# EAGLE board Relay-Board_Rack-PDU (EAGLE 9.2.1)
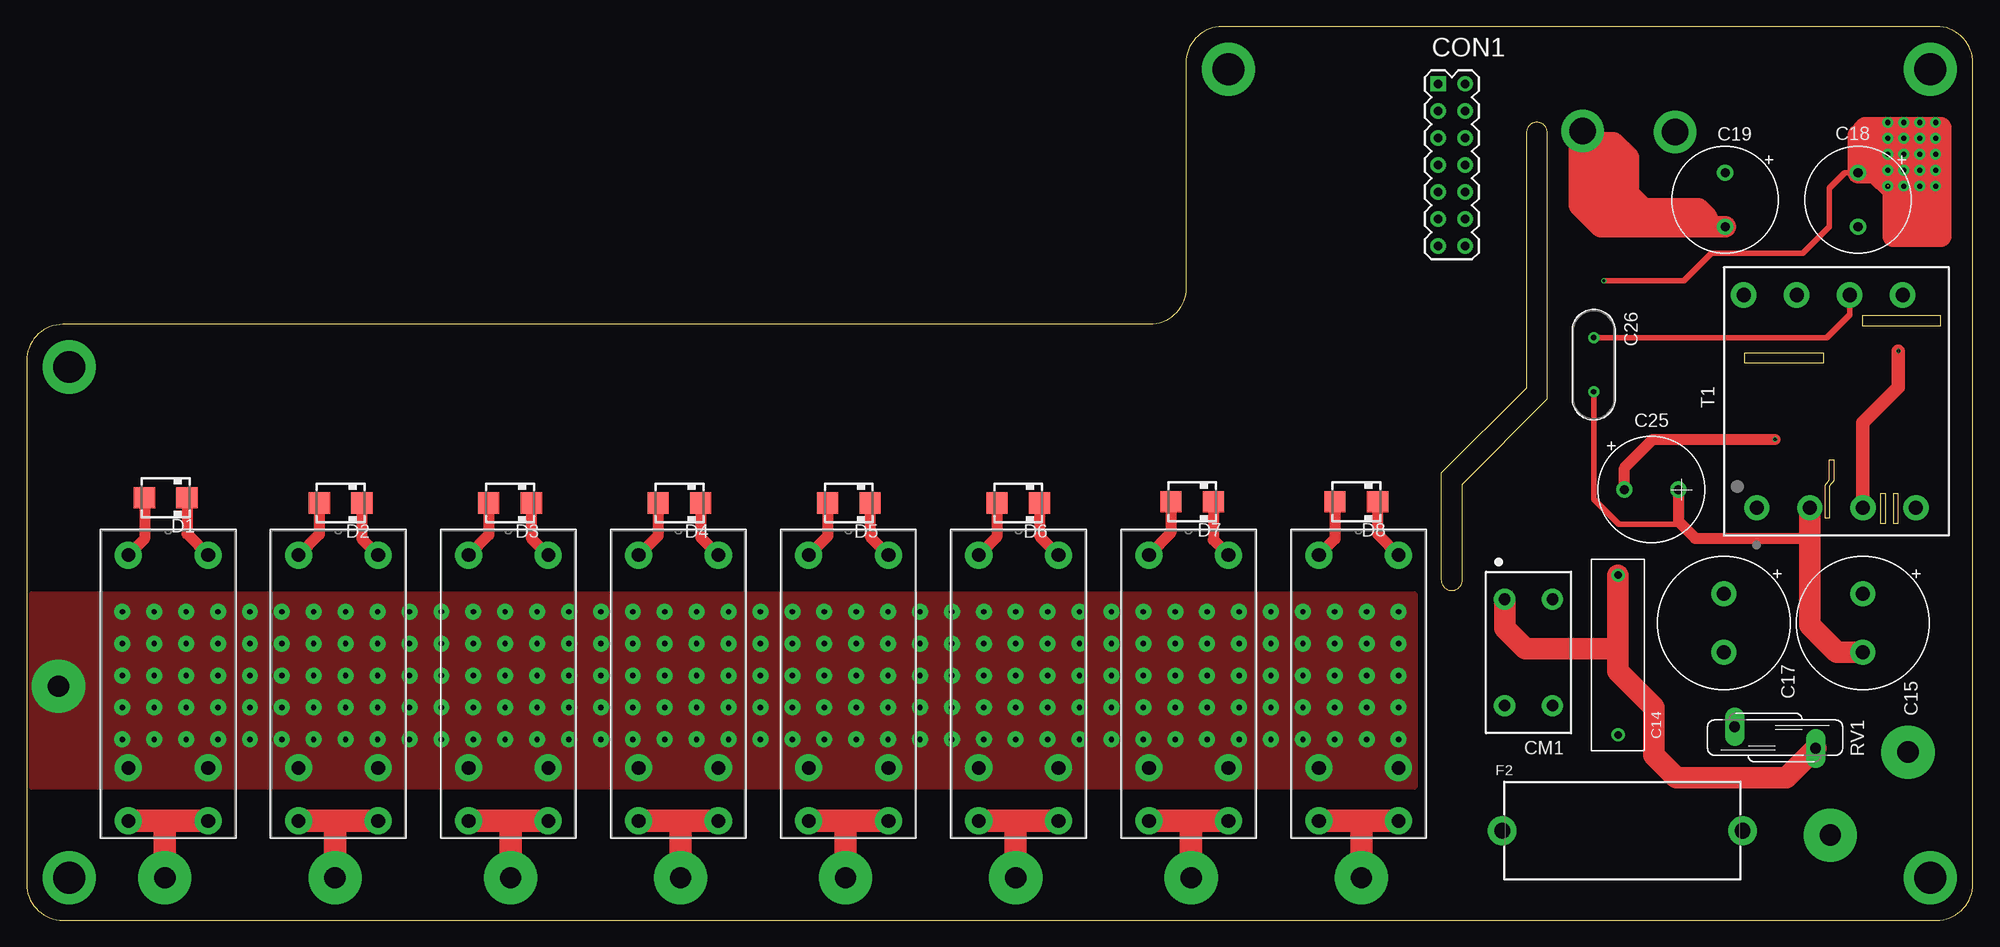
[diagram p0: board, top side]
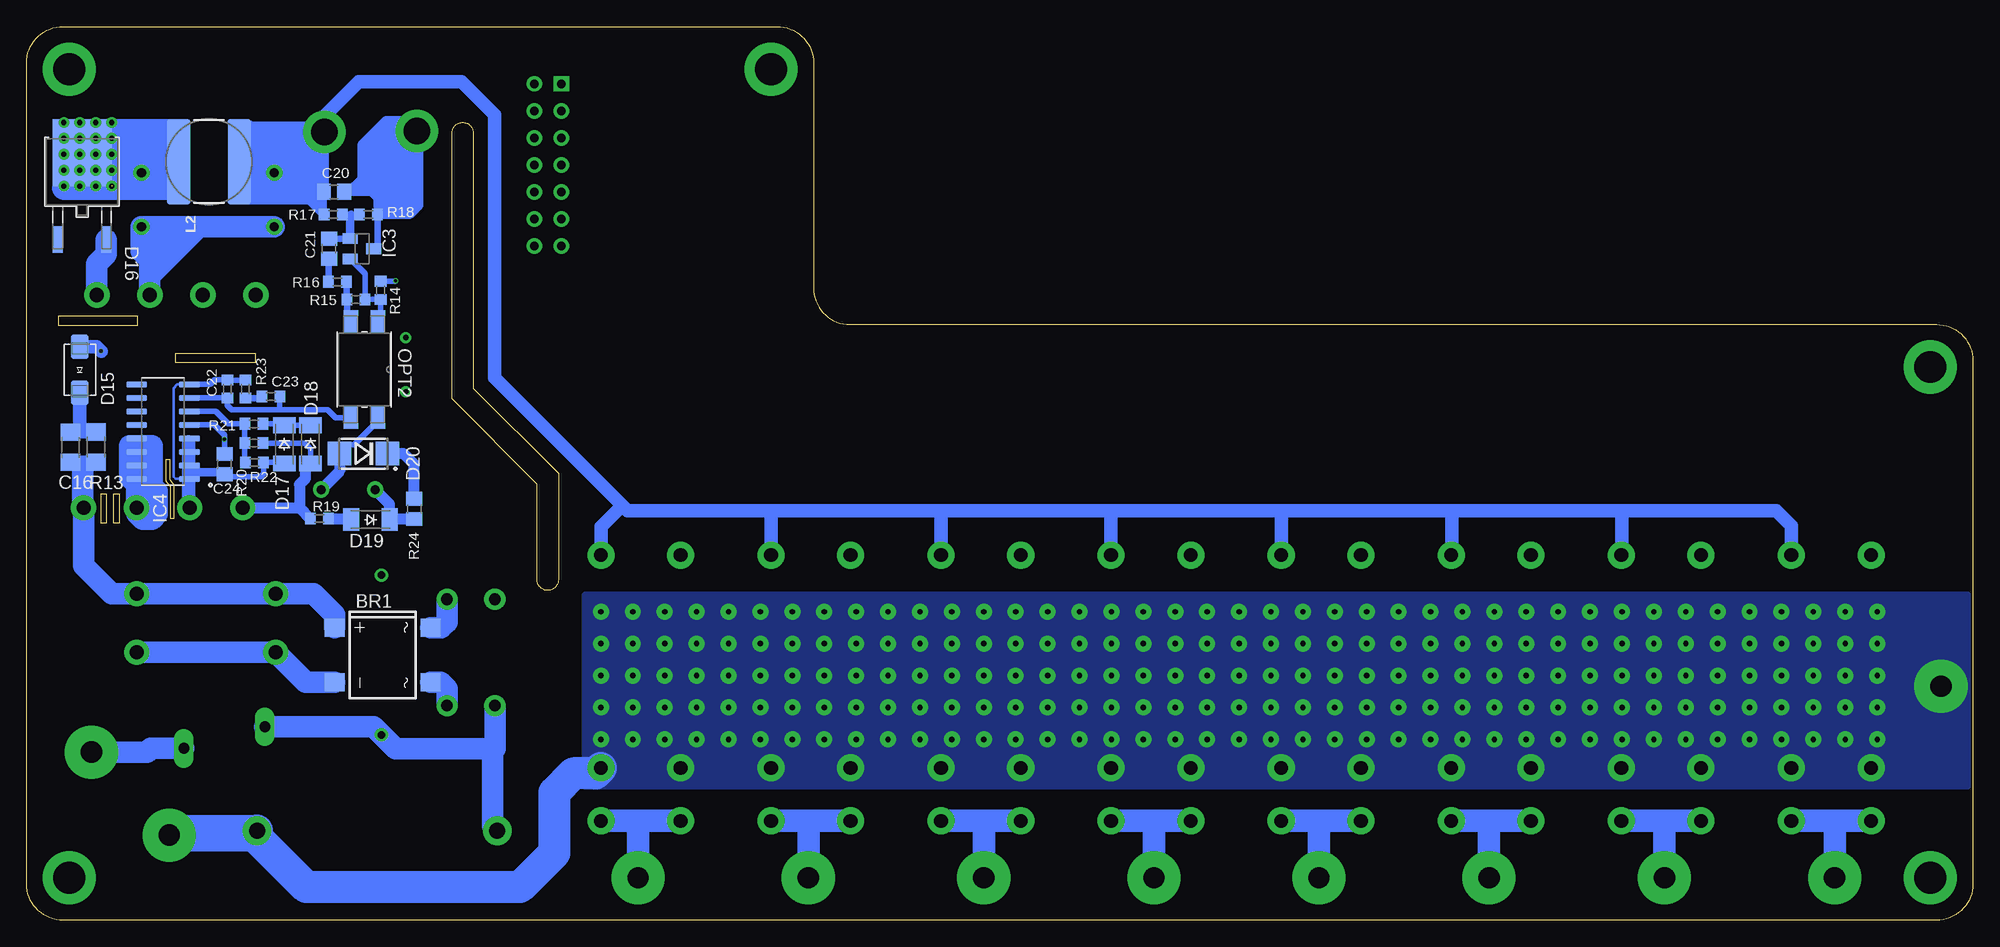
[diagram p1: board, bottom side, seen from below]

Size 183 x 84 mm. Coordinates in mm from the lower left corner, seen from the top.
Outline: 105.59,56 3.41,56 arc90 0,52.59 0,3.41 arc90 3.41,0 179.59,0 arc90 183,3.41 183,80.59 arc90 179.59,84 112.41,84 arc90 109,80.59 109,59.41 arc-90 105.59,56
Outline: 161.5,53.3 161.5,52.4 169,52.4 169,53.3 161.5,53.3
Outline: 172.6,55.9 180,55.9 180,56.8 172.6,56.8 172.6,55.9
Outline: 169.1,37.8 169.1,40.9 169.5,41.4 169.5,43.3 169.9,43.3 169.9,41.3 169.5,40.8 169.5,37.8 169.1,37.8
Outline: 175.5,40.1 175.5,37.3 176,37.3 176,40.1 175.5,40.1
Outline: 174.3,40.1 174.3,37.3 174.8,37.3 174.8,40.1 174.3,40.1
Outline: 143,49 143,74 arc90 142,75 arc90 141,74 141,50 133,42 133,32 arc90 134,31 arc90 135,32 135,41 143,49
Copper layers (1*16): Top 0.035mm / dielectric 1.6mm / Bottom 0.035mm
Design rules "jlcpcb-2layers *": minimum track width 5mil, minimum drill 0.2mm, track to track 5mil, track to pad 5mil, pad to pad 5mil, via to via 5mil, smd to smd 5mil, copper to edge 0.2mm, drill to drill 6mil, minimum pad ring 10mil, minimum via ring 3mil, stop-mask expansion 4mil, vias tented up to drill 0mil, thermal gap 10mil

## Footprints (pad centres in the part's own frame; a part is rotated, then mirrored left to right if it is on the bottom)
DBS = smd 1.7 x 1.9: + -2.55,-4.5; - 2.55,-4.5; AC1 -2.55,4.5; AC2 2.55,4.5
103-275V = drill 0.7: 1 -7.5,0; 2 7.5,0
CAPPRD550W110D1250H2500B = drill 1.3 pad 1.95: 1 -2.75,0; 2 2.75,0
C1206 = smd 1.6 x 1.803: 1 -1.422,0; 2 1.422,0
CAPPRD508W65D1000H1100B = drill 0.85 pad 1.45: 1 -2.54,0; 2 2.54,0
C0805 = smd 1.3 x 1.5: 1 -0.95,0; 2 0.95,0
C0603 = smd 1 x 1.1: 1 -0.85,0; 2 0.85,0
AR21AC103K4R = drill 0.508 pad 1.016: 1 -2.54,0; 2 2.54,0
WE-CMB_XS_744821120 = drill 1.1: 1 -5,-2.25; 2 5,-2.25; 3 5,2.25; 4 -5,2.25
2X7 = drill 0.8 square: 1 -1.27,7.62 | drill 0.8: 2 1.27,7.62; 3 -1.27,5.08; 4 1.27,5.08; 5 -1.27,2.54; 6 1.27,2.54; 7 -1.27,0; 8 1.27,0; 9 -1.27,-2.54; 10 1.27,-2.54; 11 -1.27,-5.08; 12 1.27,-5.08; 13 -1.27,-7.62; 14 1.27,-7.62
SMA = smd 2 x 2: A 2,0; C -2,0
SMA' = smd 2.28 x 1.66: A 2.165,0; C -2.165,0
DPAK_STM = smd 0.94 x 2.489: 1 -2.286,-6.388; 2 2.286,-6.388 | smd 5.563 x 6.299: 3 0,1.765
SOD-123_MINI-SMA = smd 1.5 x 2.1: A 1.8,0; C -1.8,0
DO214AC = smd 2.2 x 2.21: A 2.25,0; C -2.25,0
696101000002 = drill 1.5: 1 -11.3,0; 2 11.3,0
SOT23 = smd 1 x 1.4: 1 -0.95,-1.1; 2 0.95,-1.1; 3 0,1.1
VIPER35HD = smd 1.97 x 0.57: 1 -2.475,4.445; 2 -2.475,3.175; 3 -2.475,1.905; 4 -2.475,0.635; 5 -2.475,-0.635; 6 -2.475,-1.905; 7 -2.475,-3.175; 8 -2.475,-4.445; 9 2.475,-4.445; 10 2.475,-3.175; 11 2.475,-1.905; 12 2.475,-0.635; 13 2.475,0.635; 14 2.475,1.905; 15 2.475,3.175; 16 2.475,4.445
INDUCTOR-BOURNS_SRN8040 = smd 8 x 2.2: 1 0,2.85; 2 0,-2.85
SMD-4_SFH610X_VIS-M = smd 2.083 x 1.372: 1 -4.534,1.27; 2 -4.534,-1.27; 3 4.534,-1.27; 4 4.534,1.27
1206 = smd 1.6 x 1.803: 1 -1.422,0; 2 1.422,0
0603 = smd 1 x 1.1: 1 -0.85,0; 2 0.85,0
0805 = smd 1.3 x 1.5: 1 -0.95,0; 2 0.95,0
RELAY_G2RL-1A-E_DC5_OMR = drill 1.295 pad 2.54: 1 -3.683,12.776; 3 -3.683,-7.239; 4 -3.683,-12.217; 5 3.81,-12.217; 6 3.81,-7.239; 8 3.81,12.776
S10K40 = drill 1.016 long: 1 -1.016,-3.81; 2 1.016,3.81
WE-OLSTM_EE20_L22.2W25H16 = drill 1.32 pad 1.93: 1 -10,7.48; 3 -10,2.5; 4 -10,-2.5; 6 -10,-7.48; 8 10,-6.225; 10 10,-1.245; 12 10,3.735; 14 10,8.715

## Placement (x,y rotation side)
BR1  DBLS207G  [DBS]  149.52,24.93 270 bottom
C14  100nF 275V  [103-275V]  149.62,24.93 90 top
C15  15uF 400V  [CAPPRD550W110D1250H2500B]  172.65,27.94 270 top
C16  10nF 1kV  [C1206]  178.87,44.46 90 bottom
C17  15uF 400V  [CAPPRD550W110D1250H2500B]  159.58,27.94 270 top
C18  470uF 25V  [CAPPRD508W65D1000H1100B]  172.2,67.72 270 top
C19  100uF 25V  [CAPPRD508W65D1000H1100B]  159.7,67.72 270 top
C20  1uF 25V  [C0805]  154.1,68.47 0 bottom
C21  10nF 50V  [C0805]  154.57,63.12 90 bottom
C22  2.2nF 50V  [C0603]  164.12,49.93 90 bottom
C23  33nF 16V  [C0603]  160.03,49.23 180 bottom
C24  220pF  [C0805]  164.39,42.87 270 bottom
C25  100uF 25V  [CAPPRD508W65D1000H1100B]  152.77,40.48 0 top
C26  DE2E3KY222MA2BM01  [AR21AC103K4R]  147.35,52.22 90 top
CM1  20mH CM CHOKE  [WE-CMB_XS_744821120]  141.22,25.17 270 top
CON1  [2X7]  134,71 0 top
D1  MBRA340T3  [SMA]  13.09,39.72 180 top
D2  MBRA340T3  [SMA]  29.52,39.22 180 top
D3  MBRA340T3  [SMA]  45.45,39.22 180 top
D4  MBRA340T3  [SMA]  61.38,39.22 180 top
D5  MBRA340T3  [SMA]  77.31,39.22 180 top
D6  MBRA340T3  [SMA]  93.24,39.22 180 top
D7  MBRA340T3  [SMA]  109.59,39.33 180 top
D8  MBRA340T3  [SMA]  125.02,39.33 180 top
D15  MRA4007T3G  [SMA']  178,51.74 90 bottom
D16  STPS5H100B  [DPAK_STM]  177.78,70.36 0 bottom
D17  BAT41ZFILM  [SOD-123_MINI-SMA]  158.76,44.73 270 bottom
D18  BAT41ZFILM  [SOD-123_MINI-SMA]  156.31,44.73 270 bottom
D19  BAT41ZFILM  [SOD-123_MINI-SMA]  150.67,37.66 180 bottom
D20  MMSZ5248B-V-GS08  [DO214AC]  151.33,43.85 180 bottom
F2  696101000002  [696101000002]  150.04,8.42 180 top
IC3  TS432ILT  [SOT23]  151.46,63.12 270 bottom
IC4  [VIPER35HD]  170.17,45.93 180 bottom
L2  3.3uH SD43-332ML  [INDUCTOR-BOURNS_SRN8040]  165.85,71.3 90 bottom
OPT2  SFH6106-2T  [SMD-4_SFH610X_VIS-M]  151.25,51.77 270 bottom
R13  220K 5% 0.33W 200V  [1206]  176.48,44.47 270 bottom
R14  1K  [0603]  149.71,59.21 270 bottom
R15  12K  [0603]  152.03,58.34 180 bottom
R16  82K  [0603]  153.77,60.01 180 bottom
R17  130K 1%  [0603]  154.17,66.33 0 bottom
R18  15K 1%  [0603]  150.86,66.33 0 bottom
R19  4.7R 1%  [0603]  155.47,37.76 0 bottom
R20  330K 1%  [0603]  161.63,44.85 180 bottom
R21  133K 1%  [0603]  161.63,46.66 180 bottom
R22  30K 1%  [0603]  161.57,43.03 0 bottom
R23  47K 1%  [0603]  162.42,49.93 90 bottom
R24  220R  [0805]  146.56,38.66 90 bottom
REL1  G2RL-1A-E_DC12  [RELAY_G2RL-1A-E_DC5_OMR]  13.26,21.55 0 top
REL2  G2RL-1A-E_DC12  [RELAY_G2RL-1A-E_DC5_OMR]  29.25,21.55 0 top
REL3  G2RL-1A-E_DC12  [RELAY_G2RL-1A-E_DC5_OMR]  45.24,21.55 0 top
REL4  G2RL-1A-E_DC12  [RELAY_G2RL-1A-E_DC5_OMR]  61.23,21.55 0 top
REL5  G2RL-1A-E_DC12  [RELAY_G2RL-1A-E_DC5_OMR]  77.22,21.55 0 top
REL6  G2RL-1A-E_DC12  [RELAY_G2RL-1A-E_DC5_OMR]  93.21,21.55 0 top
REL7  G2RL-1A-E_DC12  [RELAY_G2RL-1A-E_DC5_OMR]  109.2,21.55 0 top
REL8  G2RL-1A-E_DC12  [RELAY_G2RL-1A-E_DC5_OMR]  125.19,21.55 0 top
RV1  B72210S0321K101  [S10K40]  164.4,17.17 270 top
T1  750370228  [WE-OLSTM_EE20_L22.2W25H16]  170.16,48.77 90 top

## Library data of the parts
BR1 = rectifier
C14 C16 C20-C24 C26 R13-R24 = ds_passive
C15 C17 = Capacitor; CATEGORY: Capacitor; PACKAGE_SIZE: 25MM-DIA; PACKAGE_TYPE: THT; SUBCATEGORY: Aluminum Electrolytic Capacitors; TYPE: Radial Can
C18 C19 C25 = Capacitor; CATEGORY: Capacitor; PACKAGE_SIZE: 11MM-DIA; PACKAGE_TYPE: THT; SUBCATEGORY: Aluminum Electrolytic Capacitors; TYPE: Radial Can
CM1 = ds_trafo
CON1 = ds_con
D1-D8 D17-D19 = diode
D15 = Diodes; CREATED_BY: PCBLayout.com; DIGIKEY_PART_NUMBER: SS12FSCT-ND; MANUFACTURER: ON Semiconductor; MPN: SS12; PACKAGE: SMA (DO-214AC)
D16 = ds_active; COPYRIGHT: Copyright (C) 2025 Ultra Librarian. All rights reserved.; MANUFACTURER_PART_NUMBER: STPS5H100B; MFR_NAME: STMicroelectronics
D20 = Diodes-2; CREATED_BY: PCBLayout.om; DIGIKEY_PARTNO: BZG03C240-HM3-08GICT-ND; MANUFACTURER: Vishay General Semiconductor - Diodes Division; MPN: BZG03C240-HM3-08; PACKAGE: DO-214AC
F2 = Wurth_Connectors_WR-FSH; DATASHEET-URL: https://www.we-online.com/catalog/datasheet/696101000002.pdf; IR-UL: 18A; IR-VDE: 6.3A; MATES: 696120004001; PART-NUMBER: 696101000002
IC3 = ds_ic_vreg
IC4 = ds_ic_peripherals
L2 = 52101-101-REV-A_v16
OPT2 = ds_ic_peripherals; COPYRIGHT: Copyright (C) 2025 Ultra Librarian. All rights reserved.; MANUFACTURER_PART_NUMBER: SFH6106-3; MFR_NAME: Vishay; TYPE: Optoisolators
REL1-REL8 = ds_passive; COPYRIGHT: Copyright (C) 2025 Ultra Librarian. All rights reserved.; MANUFACTURER_PART_NUMBER: G2RL-1A-E DC12; MFR_NAME: Omron
RV1 = varistor
T1 = ds_trafo; DATASHEET-URL: https://www.we-online.com/redexpert/spec/750370228?ae; FSWITCH: 50 - 60kHz; IOUT1: 1250mA; ISAT: 1325mA; L: 1.5mH; MOUNT: THT; N: 8:1:1; PART-NUMBER: 750370228; SIZE: EE20/10/6; VAUX: 12V; VIN: 85 - 265 V (AC); VOUT1: 12V; VT: 3900V(AC)

## Nets
+12V: C19.1 C20.1 D1.C D2.C D3.C D4.C D5.C D6.C D7.C D8.C L2.2 R17.1 REL1.8 REL2.8 REL3.8 REL4.8 REL5.8 REL6.8 REL7.8 REL8.8
AC_LINE: F2.1 REL1.3 REL1.6 REL2.3 REL2.6 REL3.3 REL3.6 REL4.3 REL4.6 REL5.3 REL5.6 REL6.3 REL6.6 REL7.3 REL7.6 REL8.3 REL8.6
AC_LINE2: C14.2 CM1.1 RV1.2
AGND: BR1.- C15.2 C17.2 C22.2 C24.2 C25.2 C26.1 D17.A D20.A IC4.1 IC4.2 IC4.3 IC4.4 IC4.8 OPT2.4 R22.2 R23.2 T1.3
DC_RAW: BR1.+ C15.1 C16.1 C17.1 R13.2 T1.6
FB: C22.1 C23.1 IC4.7 OPT2.3
GND: C18.2 C19.2 C20.2 C26.2 IC3.3 R18.2 T1.10
N$5: BR1.AC1 CM1.4
N$12: BR1.AC2 CM1.3
N$20: C14.1 CM1.2 F2.2 RV1.1
N$22: C16.2 D15.C R13.1
N$23: D15.A IC4.13 IC4.14 IC4.15 IC4.16 T1.4
N$24: D16.2 T1.8
N$25: C18.1 D16.3 L2.1 R14.1
N$26: IC3.2 OPT2.1 R14.2 R15.1
N$27: OPT2.2 R15.2 R16.1
N$28: C21.1 R16.2
N$29: C21.2 IC3.1 R17.2 R18.1
N$30: C24.1 C25.1 D19.C IC4.5 R24.1
N$31: D19.A R19.2
N$32: D18.A R19.1 R20.1 T1.1
N$33: D17.C D18.C R21.1
N$34: IC4.6 R20.2 R21.2 R22.1
N$35: C23.2 R23.1
N$36: D20.C R24.2
OUT_1: REL1.4 REL1.5
OUT_2: REL2.4 REL2.5
OUT_3: REL3.4 REL3.5
OUT_4: REL4.4 REL4.5
OUT_5: REL5.4 REL5.5
OUT_6: REL6.4 REL6.5
OUT_7: REL7.4 REL7.5
OUT_8: REL8.4 REL8.5
RELAY_1: D1.A REL1.1
RELAY_2: D2.A REL2.1
RELAY_3: D3.A REL3.1
RELAY_4: D4.A REL4.1
RELAY_5: D5.A REL5.1
RELAY_6: D6.A REL6.1
RELAY_7: D7.A REL7.1
RELAY_8: D8.A REL8.1

## Tracks (layer width: path | path; a pad name or v marks a point on that pad's centre or on a via)
+12V  (via drill 2.5 pad 4)
  Top 1.016: D1.C 15.09,36.31 REL1.8 | D2.C 31.52,35.87 REL2.8 | D3.C 47.45,35.93 REL3.8 | D4.C 63.38,35.99 REL4.8 | D5.C 79.31,36.05 REL5.8 | D6.C 95.24,36.11 REL6.8 | D7.C 111.59,35.75 REL7.8 | D8.C 127.02,36.31 REL8.8
  Bottom 0.61: R17.1 155.05,66.36 C20.1 155.6,68.47 155.7,68.47 157.91,68.47 C19.1
  Bottom 0.813: 155.6,68.47 155.6,66.91 R17.1 156.99,68.3 158.6,68.3
  Bottom 1.27: REL1.8 17.07,37.07 18.5,38.5 33,38.5 | 33,38.5 49,38.5 | 49,38.5 65,38.5 | 65,38.5 81,38.5 | 81,38.5 97,38.5 | 97,38.5 113,38.5 | 113,38.5 126.5,38.5 139,51 139,75.7 142.1,78.8 151.8,78.8 155.01,75.59 v155.01,74.09 | REL8.8 129,37 127.5,38.5 | REL7.8 113.01,38.49 113,38.5 | REL6.8 97.02,38.48 97,38.5 | REL5.8 81.03,38.47 81,38.5 | REL4.8 65,34.37 65,38.5 | REL3.8 49,34.38 49,38.5 | REL2.8 33,34.39 33,38.5
  Bottom 2: L2.2 162.5,70.8 162.5,68.3 158.6,68.3 155.87,68.3 155.7,68.47 | 155.6,68.47 155.6,73.5 v155.01,74.09 162.09,74.09 | 162.09,74.09 162.2,74.2 | 162.09,74.09 160.6,72.6 | 160.6,72.6 156.6,72.6 | 160.6,72.6 162.3,72.6 162.5,72.4 161.3,71.2 157,71.2 157,69.8 157.1,69.7 160.8,69.7 161.2,70.1
AC_LINE  (via drill 0.5 pad 1.5, 2 pad 5)
  Bottom 3: REL8.6 129.51,13.8 131.6,13.8 133.4,12 133.4,6.3 136.6,3.1 156.7,3.1 161.6,8 v169.6,8 169.18,8.42 F2.1
  other vias: 3,22 9,29 12,29 15,29 18,29 21,29 24,29 27,29 30,29 33,29 36,29 39,29 42,29 45,29 48,29 51,29 54,29 57,29 60,29 63,29 66,29 69,29 72,29 75,29 78,29 81,29 84,29 87,29 90,29 93,29 96,29 102,29 99,29 105,29 108,29 114,29 111,29 117,29 120,29 123,29 126,29 129,29 9,26 12,26 15,26 18,26 21,26 24,26 27,26 30,26 33,26 36,26 39,26 42,26 45,26 48,26 51,26 54,26 57,26 60,26 63,26 66,26 69,26 72,26 75,26 78,26 81,26 84,26 87,26 90,26 93,26 96,26 102,26 99,26 105,26 108,26 114,26 111,26 117,26 120,26 123,26 126,26 129,26 9,23 12,23 15,23 18,23 21,23 24,23 27,23 30,23 33,23 36,23 39,23 42,23 45,23 48,23 51,23 54,23 57,23 60,23 63,23 66,23 69,23 72,23 75,23 78,23 81,23 84,23 87,23 90,23 93,23 96,23 102,23 99,23 105,23 108,23 114,23 111,23 117,23 120,23 123,23 126,23 129,23 9,20 12,20 15,20 18,20 21,20 24,20 27,20 30,20 33,20 36,20 39,20 42,20 45,20 48,20 51,20 54,20 57,20 60,20 63,20 66,20 69,20 72,20 75,20 78,20 81,20 84,20 87,20 90,20 93,20 96,20 102,20 99,20 105,20 108,20 114,20 111,20 117,20 120,20 123,20 126,20 129,20 9,17 12,17 15,17 18,17 21,17 24,17 27,17 30,17 33,17 36,17 39,17 42,17 45,17 48,17 51,17 54,17 57,17 60,17 63,17 66,17 69,17 72,17 75,17 78,17 81,17 84,17 87,17 90,17 93,17 96,17 102,17 99,17 105,17 108,17 114,17 111,17 117,17 120,17 123,17 126,17 129,17
  pour Top (no thermals): 0.5,30.6 130.5,30.6 130.5,12.6 0.5,12.6
  pour Bottom (no thermals): 0.5,30.6 130.5,30.6 130.5,12.6 0.5,12.6
AC_LINE2  (via drill 2 pad 5)
  Top 2: RV1.2 165.46,13.4 155.1,13.4 153,15.5 153,20 149.62,23.38 149.62,25.5 | 149.62,25.5 C14.2 | CM1.1 138.97,27.43 140.9,25.5 149.62,25.5
  Bottom 2: RV1.2 171.31,16.15 171.66,15.8 v176.9,15.8
AGND
  Top 0.508: C26.1 147.35,39.55 149.7,37.2 155.02,37.2 155.31,37.49
  Top 1.016: C25.2 155.31,37.49 156.9,35.9 167.66,35.9
  Top 2: C15.2 170.21,25.19 167.66,27.74 167.66,35.9 T1.3
  Bottom 0.254: IC4.4 167.69,45.02 | 167.69,45.02 167.76,44.96 | 167.69,45.02 IC4.3 IC4.2 | 167.76,42.1 167.76,41.55 IC4.1 168.99,41.48 169.17,41.67 169.17,50.03 168.82,50.38 IC4.8
  Bottom 0.508: IC4.8 165.72,50.38 165.3,50.8 164.14,50.8 C22.2 R23.2 | D17.A 158.86,43.03 R22.2 160.72,41.98 161,41.7 164.17,41.7 C24.2 | OPT2.4 149.98,46.92 152.2,44.7 152.9,44.7 153.58,44.02 D20.A
  Bottom 0.813: C24.2 164.57,42.1 167.76,42.1
  Bottom 1.016: D20.A 153.58,42.21 C25.2
  Bottom 1.27: 167.76,44.96 167.76,42.1 167.76,38.87
  Bottom 2: BR1.- 156.77,22.38 C17.2 C15.2 | T1.3 167.76,38.87
DC_RAW
  Bottom 1.27: R13.2 177.8,43.05 | 177.8,43.05 C16.1 | 177.8,43.05 177.8,42.6 177.7,42.5
  Bottom 2: BR1.+ 154.02,28.72 155.99,30.69 C17.1 C15.1 174.99,30.69 177.64,33.34 T1.6 177.7,38.83 177.7,42.5
FB
  Bottom 0.508: IC4.7 164.15,49.1 C22.1 164.12,48.42 163.7,48 159.3,48 | C23.1 159.18,48.12 159.3,48 | OPT2.3 153.94,47.24 154.7,48 159.3,48
GND  (via drill 2.5 pad 4)
  Top 0.508: C26.2 169.26,54.76 171.41,56.91 T1.10
  Top 2: C19.2 148.02,65.18 146,67.2 146,72.7 146.2,72.7 146.6,73.1 149.2,73.1 150.6,71.7 150.6,68.3 152,66.9 157.2,66.9 158,66.1 158,65.6 150.6,65.6 149.9,65.6 147.4,68.1 147.4,70.2 146,71.6 146,73.9 v146.29,74.19
  Top 2.54: 150.6,65.6 150.6,66.6 148.6,68.6 148.6,71.3 148.8,71.5 148.6,71.7 147.8,71.7
  Bottom 0.61: IC3.3 150.01,63.47 R18.2 | 152.7,68.47 C20.2
  Bottom 0.813: R18.2 146.97,66.33 146.1,67.2 146.1,74.6 146.7,75.2 149.2,75.2 151.5,72.9 151.5,69.67 152.7,68.47 | C20.2 150.57,68.47 150,67.9 150,67.1 147.2,67.1 147,67.3 147,70.6 146.8,70.8 | 146.6,71 146.8,70.8 | 146.8,70.8 146.8,67.4
  Bottom 2: 171.41,62.1 171.41,60.6 | 171.41,60.6 T1.10 | 171.41,62.1 172.2,62.9 C18.2 166.82,65.18 | 166.82,65.18 C19.2 | 171.41,60.6 166.82,65.18 | 171.41,62.1 169.6,63.91 169.6,64.2 170.7,64.2 171.2,63.7 | 146.8,67.4 147.1,67.7 149.3,67.7 149.3,71.8 150.3,71.8 150.5,72 150.2,72.3 | 150.2,72.3 150.2,72.8 | 150.2,72.3 150.2,69.9 147.3,72.8 147.3,74 147.7,74.4 146.5,74.4 v146.29,74.19
  Bottom 2.54: v146.29,74.19 147.7,72.78 147.7,69.6 148.9,70.8 | 148.9,70.8 148.9,73.7 | 148.9,70.8 148.9,70.5 150,69.4 150.7,69.4
N$1  (via drill 3 pad 5)
  other vias: 179,4
N$2  (via drill 3 pad 5)
  other vias: 179,80
N$3  (via drill 3 pad 5)
  other vias: 4,4
N$4  (via drill 3 pad 5)
  other vias: 4,52
N$5
  Bottom 2: CM1.4 143.47,28.03 144.02,27.48 BR1.AC1
N$6  (via drill 3 pad 5)
  other vias: 113,80
N$12
  Bottom 2: CM1.3 143.47,21.77 144.08,22.38 BR1.AC2
N$20
  Bottom 2: F2.2 139.17,8.85 139.17,16.1 | CM1.2 138.97,16.1 139.17,16.1 | 139.17,16.1 148.29,16.1 C14.1 150.38,18.19 RV1.1
N$22
  Bottom 1.27: R13.1 178,45.89 | 178,45.89 178.86,45.89 C16.2 | D15.C 178,45.89
N$23  (via drill 0.3)  (1 unrouted)
  Top 1.27: T1.4 172.66,46.76 176,50.1 176,53.47
  Bottom 0.254: IC4.13 172.65,44.95 IC4.14 172.65,42.9 | IC4.15 IC4.16
  Bottom 1.27: D15.A 176.41,53.91 v176,53.5 | 172.65,44.95 172.65,42.9 IC4.16 172.65,38.78
  Bottom 2: 171.2,42.8 171.2,40.8 170.7,40.3 170.7,38.2 171.2,37.7 172.1,37.7 172.66,38.26 T1.4 172.66,40.96 173.3,41.6 173.3,44.6 171.2,44.6 171.2,42.8 | 171.2,42.8 171.9,42.8 171.8,42.7 171.8,39.5 171.93,39.5 172.65,38.78
N$24
  Bottom 2: T1.8 176.38,61.72 175.5,62.6 D16.2
N$25  (via drill 0.3, 0.5 pad 1)  (1 unrouted)
  Top 0.508: v148.3,60.1 155.8,60.1 158.4,62.7 167,62.7 169.5,65.2 169.5,68.8 170.96,70.26 C18.1
  Top 0.61: v175,73.5 v175,72 v176.5,72 v178,72 v179.5,72 v179.5,70.5 v178,70.5 v176.5,70.5 v175,70.5 175,69.1 175.5,68.6 | v175,69 v176.5,69 v178,69 v179.5,69
  Top 2: C18.1 173.84,70.26 175.5,68.6 175.5,64.3 180,64.3 180,74.5 172.9,74.5 172.2,73.8 C18.1 | C18.1 173.44,71.5 179,71.5 177.9,72.6 | 177.9,72.6 173.4,72.6 | 177.9,72.6 178.1,72.6 178.6,73.1 | 178.7,73.2 178.6,73.1 | 178.6,73.1 178.6,65.8 178.2,65.4 176.6,65.4 176.6,70 176.9,70.3 | 177.1,70.5 176.9,70.3 | 176.9,70.3 175.5,70.3
  Bottom 0.508: R14.1 148.34,60.06 v148.3,60.1
  Bottom 2: D16.3 177.6,71.94 177.6,68.7 | 177.6,68.7 169.7,68.7 169.7,74.2 169.8,74.3 175.5,74.3 175.8,74 174.6,72.8 174.6,69.3 171.1,69.3 | 171.1,69.3 170.7,69.7 | 170.7,69.7 171.6,70.6 171.6,73 173,73 173.3,72.7 173.3,70.5 172.44,70.5 C18.1 | L2.1 169.1,71.3 170.7,69.7 | 177.6,68.7 179.5,68.7 179.6,68.8 179.3,69.1 179.3,69.4 | 171.1,69.3 170.5,68.7 168.8,68.7
  other vias: 179.5,73.5 178,73.5 176.5,73.5 175,75 176.5,75 178,75 179.5,75
N$26
  Bottom 0.508: OPT2.1 149.71,56.57 R14.2 151.16,58.36 R15.1 151.18,60.79 IC3.2
N$27
  Bottom 0.61: OPT2.2 152.88,56.66 R15.2 152.92,58.38 R16.1
N$28
  Bottom 0.61: R16.2 154.62,62.12 C21.1
N$29
  Bottom 0.61: IC3.1 C21.2 | R18.1 152.5,66.33 R17.2
  Bottom 0.813: IC3.1 152.56,66.27 152.5,66.33
N$30  (via drill 0.3)
  Top 1.016: C25.1 150.23,42.53 152.9,45.2 v164.39,45.2
  Bottom 0.508: IC4.5 165.37,46.56 164.39,45.59 v164.39,45.2 C24.1
  Bottom 1.016: C25.1 148.87,39.12 D19.C 148.82,37.71 R24.1
N$31
  Bottom 1.016: R19.2 152.57,37.76 D19.A
N$32
  Bottom 0.508: R20.1 156.85,44.85 156.31,44.31 D18.A
  Bottom 1.016: T1.1 157.33,38.77 | 157.33,38.77 R19.1 | D18.A 156.8,42.44 156.8,41.5 157.33,40.97 157.33,38.77
N$33
  Bottom 0.508: R21.1 158.89,46.66 D17.C D18.C
N$34
  Bottom 0.508: IC4.6 165.24,47.84 164.06,46.66 R21.2 R20.2 162.48,43.09 R22.1
N$35
  Bottom 0.61: C23.2 161.03,49.08 R23.1
N$36
  Bottom 1.016: R24.2 146.56,42.86 147.55,43.85 D20.C
OUT_1  (via drill 2 pad 5)
  Top 2.1: REL1.4 13,9.33 | 13,9.33 REL1.5 | v13,4 13,9.33
  Bottom 2.1: REL1.4 13,9.33 | 13,9.33 REL1.5 | v13,4 13,9.33
OUT_2  (via drill 2 pad 5)
  Top 2.1: REL2.4 29.5,9.33 | 29.5,9.33 REL2.5 | v29,4 29,8.83 29.5,9.33
  Bottom 2.1: REL2.4 29,9.33 | 29,9.33 REL2.5 | v29,4 29,9.33
OUT_3  (via drill 2 pad 5)
  Top 2.1: REL3.4 45.5,9.33 | 45.5,9.33 REL3.5 | v45.5,4 45.5,9.33
  Bottom 2.1: REL3.4 45.5,9.33 | 45.5,9.33 REL3.5 | v45.5,4 45.5,9.33
OUT_4  (via drill 2 pad 5)
  Top 2.1: REL4.4 61.5,9.33 | 61.5,9.33 REL4.5 | v61.5,4 61.5,9.33
  Bottom 2.1: REL4.4 62,9.33 | 62,9.33 REL4.5 | v61.5,4 61.5,8.83 62,9.33
OUT_5  (via drill 2 pad 5)
  Top 2.1: REL5.4 77,9.33 | 77,9.33 REL5.5 | v77,4 77,9.33
  Bottom 2.1: REL5.4 77.5,9.33 | 77.5,9.33 REL5.5 | v77,4 77,8.83 77.5,9.33
OUT_6  (via drill 2 pad 5)
  Top 2.1: REL6.4 93,9.33 | 93,9.33 REL6.5 | v93,4 93,9.33
  Bottom 2.1: REL6.4 93,9.33 | 93,9.33 REL6.5 | v93,4 93,9.33
OUT_7  (via drill 2 pad 5)
  Top 2.1: REL7.4 109.5,9.33 | 109.5,9.33 REL7.5 | v109.5,4 109.5,9.33
  Bottom 2.1: REL7.4 109.5,9.33 | 109.5,9.33 REL7.5 | v109.5,4 109.5,9.33
OUT_8  (via drill 2 pad 5)
  Top 2.1: REL8.4 125.5,9.33 | 125.5,9.33 REL8.5 | v125.5,4 125.5,9.33
  Bottom 2.1: REL8.4 125.5,9.33 | 125.5,9.33 REL8.5 | v125.5,4 125.5,9.33
RELAY_1
  Top 1.016: D1.A 11.09,35.84 REL1.1
RELAY_2
  Top 1.016: D2.A 27.52,36.28 REL2.1
RELAY_3
  Top 1.016: D3.A 43.45,36.22 REL3.1
RELAY_4
  Top 1.016: D4.A 59.38,36.16 REL4.1
RELAY_5
  Top 1.016: D5.A 75.31,36.1 REL5.1
RELAY_6
  Top 1.016: D6.A 91.24,36.04 REL6.1
RELAY_7
  Top 1.016: D7.A 107.59,36.4 REL7.1
RELAY_8
  Top 1.016: D8.A 123.02,35.84 REL8.1